# Altium PCB imu_evo.PcbDoc
Units mm, origin at the board's own origin, x right, y up, seen from the top; angles counter-clockwise.
Board outline 60 x 40 mm, 3 copper layers (Top Layer, Mid-Layer 1, Bottom Layer); 54 components, 35 nets, 219 pads, 4 vias.
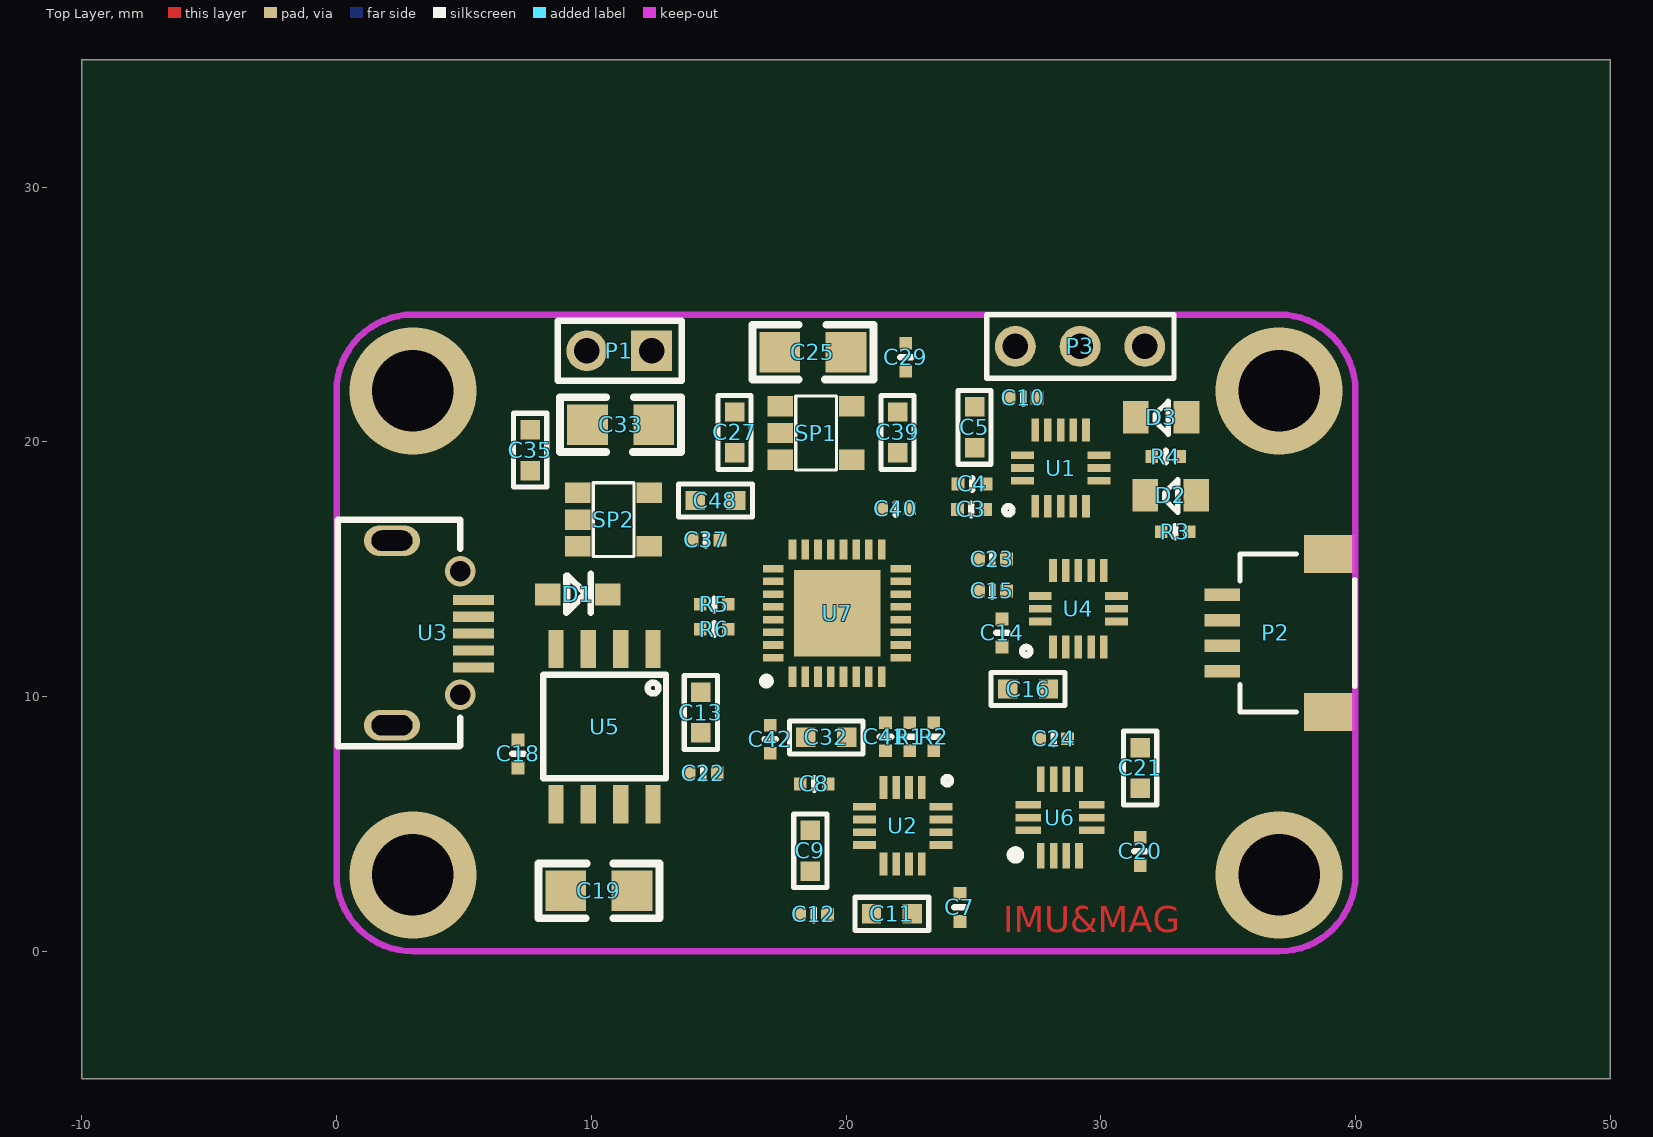
[diagram p0: Top Layer view]
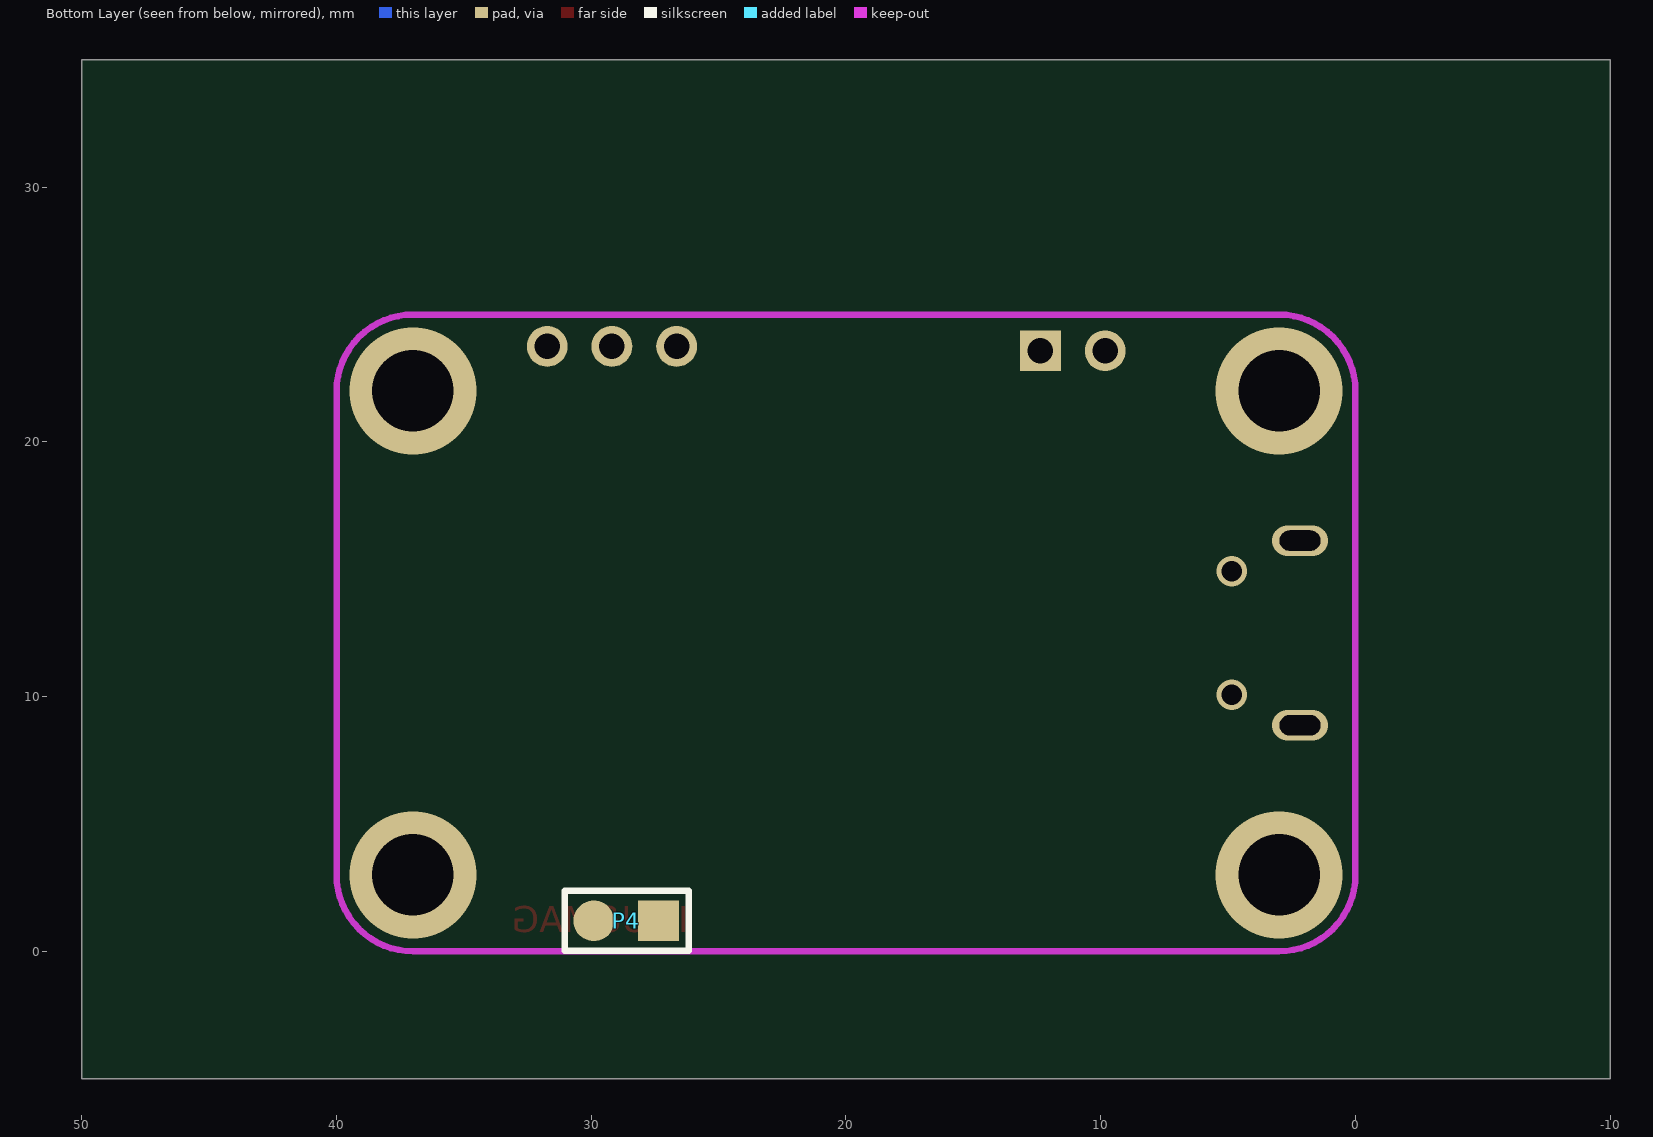
[diagram p1: Bottom Layer view, seen from below]

## Layer stack, top to bottom
Top Layer: signal copper 0.0356
Dielectric: dielectric 0.32, FR-4, Dk 4.8
Mid-Layer 1: signal copper 0.0356
Dielectric: dielectric 0.32, FR-4, Dk 4.8
Bottom Layer: signal copper 0.0356

## Board outline
-10,35 50,35 50,-5 -10,-5

## Design rules (kind name [scope] priority, off if disabled: settings)
Clearance [All] p1: gap=0.152
ComponentClearance [All] p1: gap=0 collisioncheckmode=3 verticalgap=0 showdistances=FALSE
HoleToHoleClearance [All] p1: gap=0 allowstackedmicrovias=FALSE
MinimumSolderMaskSliver [All] p1: minsoldermaskwidth=0
PlaneConnect [All] p1: planeconnectstyle=Direct reliefexpansion=0.508 reliefentries=4 reliefconductorwidth=0.254 reliefairgap=0.254
PolygonConnect [All] p1: connectstyle=Direct reliefconductorwidth=0.254 reliefentries=4 polygonreliefangle="90 Angle" airgapwidth=0.254
RoutingLayers [All] p1: top layer_v5=TRUE mid layer 1_v5=FALSE bottom layer_v5=TRUE
RoutingVias [All] p1: holewidth=0.25 width=0.55 viastyle="Through Hole" minholewidth=0.25 minwidth=0.55 maxholewidth=0.5 maxwidth=1.5
SilkToSilkClearance [All] p1: silktosilkclearance=0
SilkToSolderMaskClearance [IsPad] p1: minsilkscreentomaskgap=0 clearancetoexposedcopper=TRUE
SolderMaskExpansion [All] p1: expansion=0.102
Width [All] p1: maxlimit=2.54 minlimit=0.178 preferedwidth=0.254 toplayer_prefwidth=0.178 midlayer1_minwidth=0.254 midlayer1_maxwidth=0.254 bottomlayer_prefwidth=0.178 minimp=50.000000 maximp=50.000000 favimp=50.000000
21 further rules are at their usual default settings.

## Components (designator, comment, footprint, x,y, rotation, side; value= is the part's Value field where it differs from the comment)
C3 "104" 0402 25.475,17.35 r180 top
C4 "104" 0402 25.5,18.35 r180 top
C5 "C1uF" 0603C 25.05,21.375 r270 top
C7 "104" 0402 24.475,2.275 r270 top
C8 "104" 0402 19.3,6.575 r180 top
C9 "C1uF" 0603C 18.6,3.15 r90 top
C10 "104" 0402 27.5,21.725 r180 top
C11 "4.7UF" 0603C 21,1.475 r0 top
C12 "0.22UF" 0402 19.275,1.45 r180 top
C13 "105" 0603C 14.3,10.175 r270 top
C14 "104" 0402 26.125,11.95 r90 top
C15 "104" 0402 26.3,14.15 r180 top
C16 "C1uF" 0603C 26.35,10.3 r0 top
C18 "104" 0402 7.125,8.3 r270 top
C19 "47UF" 1206 11.6,2.375 r180 top
C20 "104" 0402 31.55,4.475 r270 top
C21 "C1uF" 0603C 31.55,8 r270 top
C22 "104" 0402 13.85,7 r0 top
C23 "104" 0402 25.2,15.4 r0 top
C24 "104" 0402 27.6,8.35 r0 top
C25 "47UF" 1206 17.4,23.525 r0 top
C27 "104" 0603C 15.625,19.575 r90 top
C29 "104" 0402 22.35,23.875 r270 top
C32 "C1uF" 0603C 20.025,8.4 r180 top
C33 "47UF" 1206 9.85,20.675 r0 top
C35 "104" 0603C 7.6,20.475 r270 top
C37 "104" 0402 15.05,16.15 r180 top
C39 "22uF" 0603C 22.025,21.175 r270 top
C40 "104" 0402 21.4,17.375 r0 top
C41 "104" 0402 21.55,8.975 r270 top
C42 "104" 0402 17.025,8.875 r270 top
C48 "22uF" 0603C 14.075,17.7 r0 top
D1 "BAT54WS" LC-SOD-323F 9.475,14.025 r180 top
D2 "LED-G" LED 33.75,17.9 r180 top
D3 "LED-R" LED 33.375,20.975 r180 top
P1 "Head2" HEAD2#1 9.825,23.575 r270 top
P2 "Head*4" B2BC-1.0-4P 35.475,9.4 r0 top
P3 "head*3" "head*3 - duplicate" 26.65,23.75 r90 top
P4 "Head2" HEAD2#2 29.9,1.2 r270 bottom
R1 "R2K" 0402 22.5,7.875 r90 top
R2 "R2K" 0402 23.45,7.875 r90 top
R3 "R2K" 0402 32.375,16.475 r0 top
R4 "R2K" 0402 32,19.425 r0 top
R5 "R10K" 0402 15.375,13.625 r180 top
R6 "R10K" 0402 15.375,12.65 r180 top
SP1 "SP6201-3-3" SOT23-5 17.425,21.4 r270 top
SP2 "SP6201-3-3" SOT23-5 9.475,18 r270 top
U1 "ICM20602" LGA16 26.925,17.475 r90 top
U2 "QMC5883" LGA16-Quad 22.975,6.425 r270 top
U3 "Micro USB" Micro_USB_t 4.85,14.925 r180 top
U4 "ICM20602" LGA16 27.625,11.95 r90 top
U5 "HT42B534" SOP-8 12.425,11.875 r270 top
U6 "ICM20600" LGA14 27.15,3.75 r90 top
U7 "STM32F031KxU6" QFN32 17.9,10.775 r90 top

## Footprints (in the part's own frame and the unit in brackets; to place one, negate y for a bottom-side part, rotate by r counter-clockwise, add the part's x,y. Pads: shape width x height; smd on the part's side, far side on the other; paste and mask are expansions set on the pad)
0402 [mm]
  rect 0.5x0.5 smd: 1(0,0) 2(1.1,0)
  silkscreen extent 0.55,-0.23 0.55,0.23
0603C [mil]
  rect 30x30 smd: 1(0,0) 2(62.99,0)
  silkscreen extent -26,-26 89,26
1206 [mm]
  rect 1.6x1.6 smd: 1(0,0) 2(2.6,0)
  silkscreen extent -1.07,-1.07 3.67,1.07
B2BC-1.0-4P [mm]
  rect 2x1.5 smd: 0(3.5,0) 0(3.5,6.2)
  rect 1.4x0.5 smd: 1(-0.7,1.6) 2(-0.7,2.6) 3(-0.7,3.6) 4(-0.7,4.6)
  silkscreen extent 0,0 4.5,6.2
HEAD2#1 [mm]
  rect 1.6x1.6 hole 1: 1(0,2.54)
  round 1.6 hole 1: 2(0,0)
  silkscreen extent -1.17,-1.15 1.17,3.72
HEAD2#2 [mm]
  rect 1.6x1.6 smd: 1(0,2.54)
  round 1.6 smd: 2(0,0)
  silkscreen extent -1.17,-1.15 1.17,3.72
"head*3 - duplicate" [mm]
  round 1.6 hole 1: 1(0,0) 2(0,-2.54) 3(0,-5.08)
  silkscreen extent -1.25,-6.22 1.25,1.12
LC-SOD-323F [mm]
  rect 1x0.83 smd: 1(1.18,0.025) 1(1.18,0) 2(-1.18,0.025) 2(-1.18,0)
  silkscreen extent -0.5,-0.8 0.45,0.72, body extent -1.4,-0.67 1.4,0.68, height 0.75
LED [mil]
  rect 40x50 smd: 1(0,0) 2(78.74,0)
  silkscreen extent 29,-25 49,27
LGA14 [mm]
  rect 1x0.3 smd: 1(0,-0.5) 2(0,-1) 3(0,-1.5) 4(0,-2) 8(3,-2) 9(3,-1.5) 10(3,-1) 11(3,-0.5)
  rect 0.3x1 smd: 5(1,-2.5) 6(1.5,-2.5) 7(2,-2.5) 12(2,0) 13(1.5,0) 14(1,0)
  silkscreen extent -0.18,0.28 0.25,0.71
LGA16 [mm]
  rect 0.9x0.3 smd: 1(0,-0.5) 2(0,-1) 3(0,-1.5) 4(0,-2) 5(0,-2.5) 9(3,-2.5) 10(3,-2) 11(3,-1.5) 12(3,-1) 13(3,-0.5)
  rect 0.3x0.9 smd: 6(1,-3) 7(1.5,-3) 8(2,-3) 14(2,0) 15(1.5,0) 16(1,0)
  silkscreen extent -0.32,0.39 0,0.71
LGA16-Quad [mm]
  rect 0.9x0.3 smd: 1(0,0) 2(0,-0.5) 3(0,-1) 4(0,-1.5) 9(3,-1.5) 10(3,-1) 11(3,-0.5) 12(3,0)
  rect 0.3x0.9 smd: 5(0.75,-2.25) 6(1.25,-2.25) 7(1.75,-2.25) 8(2.25,-2.25) 13(2.25,0.75) 14(1.75,0.75) 15(1.25,0.75) 16(0.75,0.75)
  silkscreen extent -0.42,0.86 -0.13,1.14
Micro_USB_t [mm]
  round 1.2 hole 0.8: 0(-0.005,4.85) 0(-0.005,0)
  oval 2.2x1.2 hole 0.8 slot 1.6 at 0 deg: 0(2.675,6.05) 0(2.675,-1.2)
  rect 1.6x0.4 smd: 1(-0.525,1.125) 2(-0.525,1.787) 3(-0.525,2.45) 4(-0.525,3.112) 5(-0.525,3.775)
  silkscreen extent 0,-2.02 4.8,6.88
QFN32 [mm]
  rect 3.4x3.4 smd: 0(2.5,-1.75)
  rect 0.8x0.3 smd: 1(0,0) 2(0,-0.5) 3(0,-1) 4(0,-1.5) 5(0,-2) 6(0,-2.5) 7(0,-3) 8(0,-3.5) 17(5,-3.5) 18(5,-3) 19(5,-2.5) 20(5,-2) 21(5,-1.5) 22(5,-1) 23(5,-0.5) 24(5,0)
  rect 0.3x0.8 smd: 9(0.75,-4.25) 10(1.25,-4.25) 11(1.75,-4.25) 12(2.25,-4.25) 13(2.75,-4.25) 14(3.25,-4.25) 15(3.75,-4.25) 16(4.25,-4.25) 25(4.25,0.75) 26(3.75,0.75) 27(3.25,0.75) 28(2.75,0.75) 29(2.25,0.75) 30(1.75,0.75) 31(1.25,0.75) 32(0.75,0.75)
  silkscreen extent -0.3,0.88 -0.03,1.16
SOP-8 [mm]
  rect 1.5x0.6 smd: 1(0,0) 2(0,-1.27) 3(0,-2.54) 4(0,-3.81) 5(6.096,-3.81) 6(6.096,-2.54) 7(6.096,-1.27) 8(6.096,0)
  silkscreen extent 1.02,-4.32 5.08,0.51
SOT23-5 [mm]
  rect 0.8x1 smd: 1(0,0) 2(1.05,0) 3(2.1,0) 4(2.1,2.8) 5(0,2.8)
  silkscreen extent -0.4,0.6 2.5,2.2

## Part data
C3 C4 C5 C7 C8 C9 C10 C11 C12 C13 C14 C15 C16 C18 C20 C21 C22 C23 C24 C27 C29 C32 C35 C37 C40 C41 C42: library part C0.1uF
C19 C25 C33 C39 C48: library part C100uF
D1: library part Diode
D2 D3: library part LED
R1 R2 R3 R4: library part R10K
SP1 SP2: library part SP6201
U3: library part "MINI USB"

## Via types
v1: diameter 5, hole 3.2, Top Layer to Bottom Layer, tented both sides, 4 vias

## Nets (pads, with @x,y where several pads share a name; then routed paths per layer and width w, separated by ;. In a path a pad name is that pad's centre, name@x,y a point inside that pad or via, vN(x,y) a via of type N, cw(c..) or ccw(c..) an arc to the next point about the centre after c; other vN are vias at no path point)
4V3: C25.1 C27.2 C33.1 C35.2 D1.2 P1.2 P2.4 SP1.1 SP1.3 SP2.1 SP2.3
D+: U3.3 U5.5
D-: U3.2 U5.6
GND: C3.2 C4.2 C5.1 C7.2 C8.2 C9.1 C10.1 C11.2 C13.1 C14.2 C15.2 C16.1 C18.2 C19.2 C20.2 C21.1 C22.2 C23.1 C24.2 C25.2 C27.1 C29.1 C32.1 C33.2 C35.1 C37.1 C39.2 C40.2 C41.2 C42.2 C48.2 P1.1 P2.1 P3.1 R6.2 SP1.2 SP2.2 U1.8 U1.9 U1.10 U1.11 U1.12 U1.13 U1.15 U2.9 U2.11 U3.5 U4.8 U4.9 U4.10 U4.11 U4.12 U4.13 U4.15 U5.1 U6.6 U6.7 U7.0
LED0: D2.2 U7.27
LED1: D3.2 U7.28
NetC10_2: C10.2 U1.14
NetC11_1: C11.1 U2.10
NetC12_1: C12.1 U2.12
NetC12_2: C12.2 U2.8
NetC23_2: C23.2 U4.14
NetC24_1: C24.1 U6.11
NetC32_2: C32.2 U7.4
NetD2_1: D2.1 R3.2
NetD3_1: D3.1 R4.2
NetR5_1: R5.1 U7.32
NetR6_1: R6.1 U7.31
RX: P2.3 U5.2 U7.30
RX2: P4.1 U7.9
SCL: R1.1 U2.1 U7.19
SDA: R2.1 U2.16 U7.20
SPI-CS0: U1.5 U7.16
SPI-CS1: U4.5 U7.15
SPI-CS2: U6.12 U7.14
SPI-MISO: U1.4 U4.4 U6.1 U7.12
SPI-MOSI: U1.3 U4.3 U6.14 U7.13
SPI-SCK: U1.2 U4.2 U6.13 U7.11
SWCLK: P3.3 U7.24
SWDIO: P3.2 U7.23
TX: P2.2 U5.4 U7.29
TX2: P4.2 U7.8
VBUS: C18.1 C19.1 D1.1 R5.2 U3.1 U5.7
VCC: C3.1 C4.1 C5.2 C7.1 C8.1 C9.2 C14.1 C15.1 C16.2 C20.1 C21.2 C29.2 C39.1 R1.2 R2.2 SP1.5 U1.1 U1.16 U2.2 U2.4 U2.6 U2.13 U4.1 U4.16 U6.5 U6.8
VDD: C37.2 C40.1 C41.1 C42.1 C48.1 R3.1 R4.1 SP2.5 U7.1 U7.5 U7.17
VDDIO: C13.2 C22.1 U5.3 U5.8
pads on no net: P2.0 SP1.4 SP2.4 U1.6 U1.7 U2.3 U2.5 U2.7 U2.14 U2.15 U3.0 U3.4 U4.6 U4.7 U6.2 U6.3 U6.4 U6.9 U6.10 U7.2 U7.3 U7.6 U7.7 U7.10 U7.18 U7.21 U7.22 U7.25 U7.26
copper on no net:
  other v1: 3,3 37,3 3,22 37,22

## Keep-outs
Keep-Out Layer:
  lines w0.254: 0,3 ccw(c3,3) 3,0 ; 0,3.025 0,22.025 ; 0,22 cw(c3,22) 3,25 ; 2.975,25 37,25 cw(c37,22) 40,22 40,3 cw(c37,3) 37,0 3.025,0

## Other copper
Top Layer:
  text "IMU&MAG" at 26.175,0.75 h1.02